# EAGLE board data_proV2 (EAGLE 7.6.0)
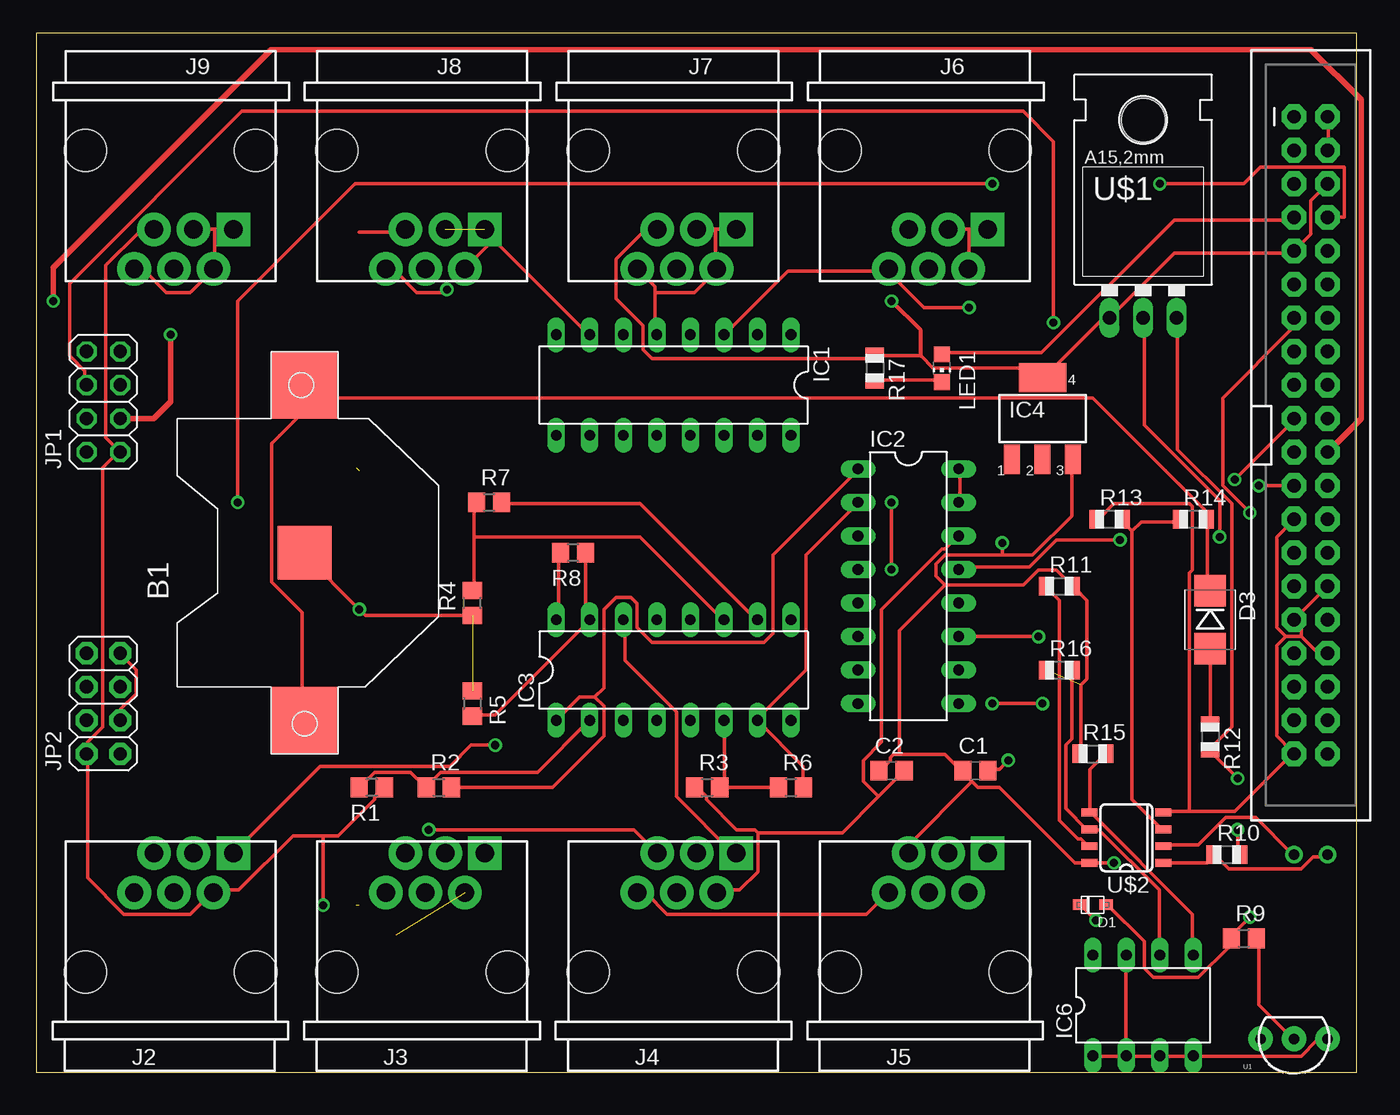
[diagram p0: board, top side]
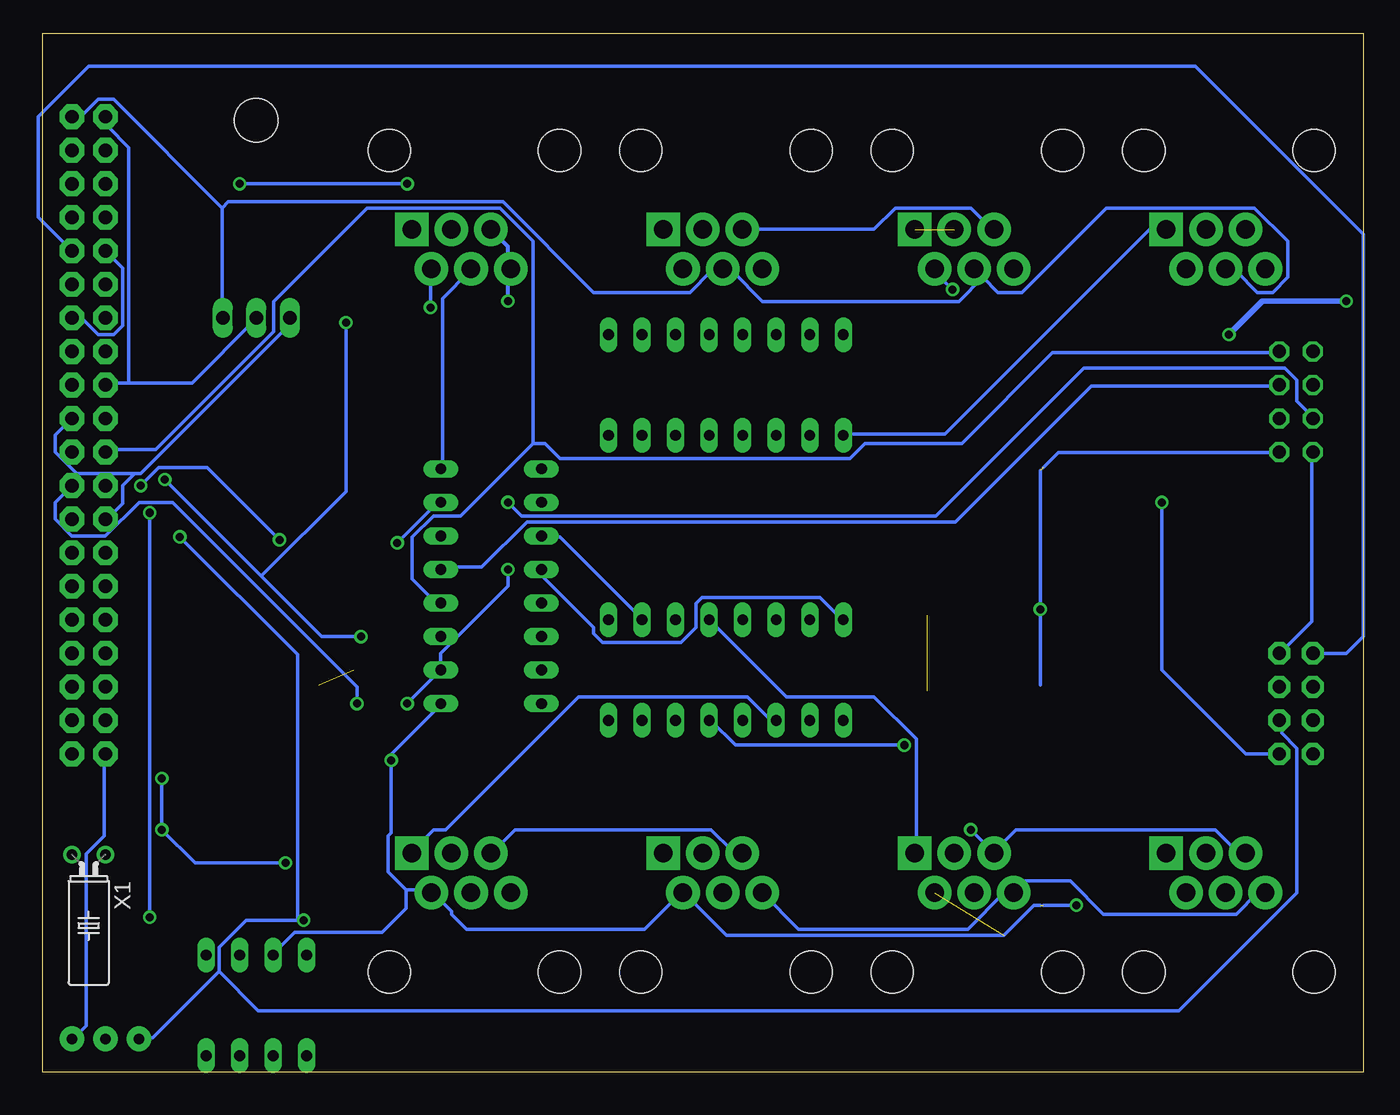
[diagram p1: board, bottom side, seen from below]

Size 100 x 78.73 mm. Coordinates in mm from the lower left corner, seen from the top.
Outline: 0,0 100,0 100,78.73 0,78.73 0,0
Copper layers (1*16): Top 0.035mm / dielectric 1.5mm / Bottom 0.035mm
Design rules "default": minimum track width 10mil, minimum drill 24mil, track to track 8mil, track to pad 8mil, pad to pad 8mil, via to via 8mil, smd to smd 8mil, copper to edge 40mil, drill to drill 8mil, minimum pad ring 10mil, minimum via ring 8mil, stop-mask expansion 4mil, vias tented up to drill 0mil, thermal gap 10mil

## Footprints (pad centres in the part's own frame; a part is rotated, then mirrored left to right if it is on the bottom)
CR2032-SMD = smd 5.08 x 5.08: +$1 -12.7,0; +$2 12.7,0 | smd 4.064 x 4.064: - 0,0
C0805 = smd 1.3 x 1.5: 1 -0.95,0; 2 0.95,0
SOD-323F = smd 1 x 0.8: A -1,0; C 1,0
SMB-DIODE = smd 2.4 x 2.4: A 2.2,0; C -2.2,0
DIL16 = drill 0.813 long: 1 -8.89,-3.81; 2 -6.35,-3.81; 3 -3.81,-3.81; 4 -1.27,-3.81; 5 1.27,-3.81; 6 3.81,-3.81; 7 6.35,-3.81; 8 8.89,-3.81; 9 8.89,3.81; 10 6.35,3.81; 11 3.81,3.81; 12 1.27,3.81; 13 -1.27,3.81; 14 -3.81,3.81; 15 -6.35,3.81; 16 -8.89,3.81
SOT223 = smd 1.219 x 2.235: 1 -2.311,-3.099; 2 0,-3.099; 3 2.311,-3.099 | smd 3.6 x 2.2: 4 0,3.099
DIL08 = drill 0.813 long: 1 -3.81,-3.81; 2 -1.27,-3.81; 3 1.27,-3.81; 4 3.81,-3.81; 5 3.81,3.81; 6 1.27,3.81; 7 -1.27,3.81; 8 -3.81,3.81
2X20-SHROUDED = drill 1.016 pad 1.88 octagon: 1 -1.27,24.13; 2 1.27,24.13; 3 -1.27,21.59; 4 1.27,21.59; 5 -1.27,19.05; 6 1.27,19.05; 7 -1.27,16.51; 8 1.27,16.51; 9 -1.27,13.97; 10 1.27,13.97; 11 -1.27,11.43; 12 1.27,11.43; 13 -1.27,8.89; 14 1.27,8.89; 15 -1.27,6.35; 16 1.27,6.35; 17 -1.27,3.81; 18 1.27,3.81; 19 -1.27,1.27; 20 1.27,1.27; 21 -1.27,-1.27; 22 1.27,-1.27; 23 -1.27,-3.81; 24 1.27,-3.81; 25 -1.27,-6.35; 26 1.27,-6.35; 27 -1.27,-8.89; 28 1.27,-8.89; 29 -1.27,-11.43; 30 1.27,-11.43; 31 -1.27,-13.97; 32 1.27,-13.97; 33 -1.27,-16.51; 34 1.27,-16.51; 35 -1.27,-19.05; 36 1.27,-19.05; 37 -1.27,-21.59; 38 1.27,-21.59; 39 -1.27,-24.13; 40 1.27,-24.13
BTA = drill 1.4 pad 2.54 square: 1 4.75,9 | drill 1.4 pad 2.54: 2 3.25,6; 3 1.75,9; 4 0.25,6; 5 -1.25,9; 6 -2.75,6 | hole 3.2: 6.45,0; -6.45,0
BTD = drill 1.4 pad 2.54 square: 1 -4.75,6 | drill 1.4 pad 2.54: 2 -3.25,9; 3 -1.75,6; 4 -0.25,9; 5 1.25,6; 6 2.75,9 | hole 3.2: 6.45,0; -6.45,0
2X04 = drill 1.016 octagon: 1 -3.81,-1.27; 2 -3.81,1.27; 3 -1.27,-1.27; 4 -1.27,1.27; 5 1.27,-1.27; 6 1.27,1.27; 7 3.81,-1.27; 8 3.81,1.27
2X04' = drill 1.016 pad 1.676 octagon: 1 -3.81,-1.27; 2 -3.81,1.27; 3 -1.27,-1.27; 4 -1.27,1.27; 5 1.27,-1.27; 6 1.27,1.27; 7 3.81,-1.27; 8 3.81,1.27
CHIP-LED0805 = smd 1.2 x 1.2: A 0,-1.05; C 0,1.05
R0805 = smd 1.3 x 1.5: 1 -0.95,0; 2 0.95,0
R0805' = smd 1.1 x 1.4: 1 -1,0; 2 1,0
TO-92-AMMO = drill 0.813 pad 1.88: 1 -2.54,0; 2 0,0; 3 2.54,0
78XXL = drill 1.016 long: GND 0,-3.81; IN -2.54,-3.81; OUT 2.54,-3.81 | hole 3.302: 0,11.176
SO08-TIGHT = smd 0.6 x 1.2: 1 -1.905,-2.8; 2 -0.635,-2.8; 3 0.635,-2.8; 4 1.905,-2.8; 5 1.905,2.8; 6 0.635,2.8; 7 -0.635,2.8; 8 -1.905,2.8
TC38H = drill 0.813: 1 -1.27,0; 2 1.27,0

## Placement (x,y rotation side)
B1  [CR2032-SMD]  20.32,39.37 90 top
C1  0.1uFd  [C0805]  71.12,22.86 0 top
C2  0.1uFd  [C0805]  64.77,22.86 0 top
D1  [SOD-323F]  80.01,12.7 180 top
D3  [SMB-DIODE]  88.9,34.29 270 top
IC1  4049N  [DIL16]  48.26,52.07 180 top
IC2  MCP3008  [DIL16]  66.04,36.83 270 top
IC3  OP11S  [DIL16]  48.26,30.48 0 top
IC4  LM340MP-05  [SOT223]  76.2,49.53 0 top
IC6  AT24CP  [DIL08]  83.82,5.08 0 top
J1  RASPBERRYPI-40-PIN-GPIO  [2X20-SHROUDED]  96.52,48.26 0 top
J2  [BTA]  10.16,7.62 0 top
J3  [BTA]  29.21,7.62 0 top
J4  [BTA]  48.26,7.62 0 top
J5  [BTA]  67.31,7.62 0 top
J6  [BTD]  67.31,69.85 180 top
J7  [BTD]  48.26,69.85 180 top
J8  [BTD]  29.21,69.85 180 top
J9  [BTD]  10.16,69.85 180 top
JP1  [2X04]  5.08,50.8 90 top
JP2  [2X04']  5.08,27.94 90 top
LED1  [CHIP-LED0805]  68.58,53.34 180 top
R1  [R0805]  25.4,21.59 180 top
R2  [R0805]  30.48,21.59 0 top
R3  [R0805]  50.8,21.59 0 top
R4  [R0805]  33.02,35.56 90 top
R5  [R0805]  33.02,27.94 270 top
R6  [R0805]  57.15,21.59 0 top
R7  [R0805]  34.29,43.18 0 top
R8  [R0805]  40.64,39.37 180 top
R9  4.7k  [R0805]  91.44,10.16 0 top
R10  N/A?  [R0805']  90.17,16.51 0 top
R11  3.3k  [R0805']  77.47,36.83 0 top
R12  200  [R0805']  88.9,25.4 270 top
R13  1.5M  [R0805']  81.28,41.91 0 top
R14  510K  [R0805']  87.63,41.91 0 top
R15  3.3k  [R0805']  80.01,24.13 0 top
R16  3.3k  [R0805']  77.47,30.48 0 top
R17  1k  [R0805']  63.5,53.34 270 top
U1  DS18B20  [TO-92-AMMO]  95.25,2.54 180 top
U$1  V_REG_LD1117VXX  [78XXL]  83.82,60.96 0 top
U$2  DS1307SO8-TIGHT  [SO08-TIGHT]  82.55,17.78 90 top
X1  32.768khz  [TC38H]  96.52,16.51 180 bottom

## Library data of the parts
B1 D1 IC2 JP2 R10-R17 = adafruit
C1 C2 R1-R9 = resistor
D3 = SparkFun-DiscreteSemi; PROD_ID: DIO-09646
IC1 = 40xx
IC3 IC4 = linear
IC6 = atmel; MPN: AT24C1024BW-SH-B; OC_FARNELL: 1362646; OC_NEWARK: 03P2044
J1 = SparkFun-Boards
J2-J9 = SparkFun-Connectors
JP1 = pinhead
LED1 = led
U1 = SparkFun-Sensors; STORE_ID: SEN-00245
U$1 = SparkFun-PowerIC
U$2 = SparkFun-FreqCtrl; PROD_ID: IC-08138
X1 = crystal; OC_FARNELL: unknown; OC_NEWARK: unknown

## Nets
3.3V: D1.C J1.1 J1.17 JP1.2 JP2.3 JP2.7 U1.3 U$1.GND
5V: C1.1 C2.1 IC2.15 IC2.16 IC4.3 J1.2 J1.4 J2.5 J3.5 J4.5 J5.5 J6.4 J7.4 J8.4 J9.4 R10.2 R11.2 R12.2 R15.1 R16.1 U$1.OUT U$2.8
A1: IC2.1 IC3.1 R2.2
A2: IC2.2 IC3.7 R6.2
A3: IC2.3 IC3.10 R7.2
A4: IC2.4 IC3.16 R8.2
BATT: R13.2 R14.1 U$2.3
CE: J1.22 JP1.3
CSN: IC2.10 J1.24 JP1.4
DQ: D1.A J1.13 R9.1
GND: B1.- C1.2 C2.2 IC2.9 IC2.14 IC4.4 IC6.1 IC6.2 IC6.3 IC6.4 IC6.7 J1.6 J1.9 J1.14 J1.20 J1.25 J1.30 J1.34 J1.39 J2.2 J3.2 J4.2 J5.2 J6.5 J7.5 J8.5 J9.5 JP1.1 JP2.2 R1.1 R3.1 R4.1 R5.1 R13.1 R17.1 U1.1 U$1.IN U$2.4
GPIO0: JP2.6
GPIO2: JP2.4
IRQ: JP1.8
MISO: IC2.12 J1.21 JP1.7
MOSI: IC2.11 J1.19 JP1.6
N$1: U$2.2 X1.1
N$2: R10.1 U$2.1 X1.2
N$3: B1.+$1 B1.+$2 D3.C R14.2
N$4: J1.7 LED1.A
N$5: IC3.2 R1.2 R2.1
N$6: R9.2 U1.2
N$7: IC3.15 R5.2 R8.1
N$8: IC3.6 R3.2 R6.1
N$10: D3.A R12.1
N$11: IC1.3 J6.1 J6.2 J6.3 J6.6
N$12: IC1.5 J7.1 J7.2 J7.3 J7.6
N$13: IC1.2
N$14: IC1.7 J8.1 J8.2 J8.3 J8.6
N$15: IC1.9 J9.1 J9.2 J9.3 J9.6
N$16: IC3.11 R4.2 R7.1
N$17: LED1.C R17.2
N$21: IC1.4
N$22: IC1.6
N$23: IC1.10
RST: JP2.5
RX: J1.10 JP2.8
S1-5V1: IC3.5 J2.1
S1-5V2: IC3.12 J3.1
S1-5V3: IC3.3 J5.1
S1-5V4: IC3.14 J4.1
S1-10V: J2.6 J3.6 J4.6 J5.6
SCK: IC2.13 J1.23 JP1.5
SCL: IC6.6 R16.2 U$2.6
SDA: IC6.5 R15.2 U$2.5
SQ: R11.1 U$2.7
TX: J1.8 JP2.1
V+: IC3.4
V-: IC3.13
VCC: IC6.8
VDD: IC1.1
VSS: IC1.8

## Tracks (layer width: path | path; a pad name or v marks a point on that pad's centre or on a via)
3.3V  (via drill 0.61)
  Top 0.254: JP2.3 6.4,26.85 6.4,27.53 7.54,28.68 7.54,30.5 6.4,31.65 JP2.7 | v80.24,11.53 79.1,12.68 D1.C | v89.61,40.56 89.61,43.31 83.9,49.02 83.9,57.02 U$1.GND
  Bottom 0.254: JP1.2 3.89,46.96 3.89,34.16 6.17,31.88 JP2.7 | 80.7,11.53 84.58,11.53 86.64,9.47 86.64,7.64 | 86.64,7.64 91.67,2.62 92.58,2.62 U1.3 | 93.5,52.22 95.1,52.22 J1.17 | 93.5,52.22 88.7,52.22 83.9,57.02 U$1.GND | 93.5,52.22 93.5,70.05 95.1,71.65 95.1,72.34 J1.1 | 80.7,11.53 80.7,31.65 v89.61,40.56 | 80.7,11.53 v80.24,11.53 | 86.64,7.64 83.67,4.67 13.95,4.67 5.03,13.59 5.03,24.56 6.17,25.71 6.17,26.62 JP2.3
5V  (via drill 0.61)  (1 unrouted)
  Top 0.254: IC2.15 69.95,43.31 69.95,45.59 IC2.16 | R15.1 79.1,24.33 79.1,29.36 79.55,29.82 79.55,35.76 78.64,36.68 R11.2 78.41,36.91 77.27,38.05 75.89,38.05 74.75,36.91 68.81,36.91 | 73.15,39.19 68.81,39.19 68.12,38.51 68.12,37.59 68.81,36.91 | 73.15,39.19 75.44,39.19 78.41,42.16 78.41,46.28 IC4.3 | 73.15,39.19 v73.15,40.11 | 70.87,22.05 70.18,22.73 C1.1 69.95,22.96 68.81,24.11 65.38,24.11 | 70.87,22.05 71.32,21.59 72.92,21.59 78.64,15.88 U$2.8 v81.61,15.88 | 65.38,24.11 64.92,24.11 64.69,23.88 64.69,23.65 64.01,22.96 C2.1 | 70.87,22.05 66.06,17.25 66.06,16.79 J5.5 | v29.72,18.39 45.26,18.39 46.86,16.79 J4.5 | 68.81,36.91 65.38,33.48 65.38,24.11 | J1.4 97.84,70.05 97.84,72.34 J1.2 | U$1.OUT 86.41,57.02 86.41,47.19 90.53,43.08 90.53,26.16 88.92,24.56 R12.2 88.92,24.33 v90.98,22.28 | v90.98,18.39 90.98,16.56 R10.2
  Bottom 0.254: IC2.16 69.72,45.82 69.72,58.62 67.67,60.68 J6.4 | IC2.15 70.41,42.62 70.64,42.62 v73.15,40.11 | J2.5 8.91,16.79 9.6,16.79 11.2,18.39 26.29,18.39 27.89,16.79 J3.5 28.12,16.79 v29.72,18.39 | J4.5 47.09,16.79 47.78,16.79 49.38,18.39 64.24,18.39 65.84,16.79 J5.5 | 28.8,60.22 29.26,60.68 J8.4 28.8,60.22 | 28.8,60.22 27.66,59.08 25.83,59.08 19.43,65.48 8.23,65.48 5.71,62.97 5.71,60.22 6.86,59.08 8,59.08 9.6,60.68 10.29,60.68 J9.4 | 28.8,60.22 30.63,58.39 45.49,58.39 47.78,60.68 48.46,60.68 J7.4 48.69,60.68 49.38,60.68 50.98,59.08 58.29,59.08 65.15,65.94 85.95,65.94 86.41,65.48 | v90.98,22.28 v90.98,18.39 88.47,15.88 v81.61,15.88 | 86.41,65.48 94.64,73.71 95.78,73.71 96.93,72.57 97.61,72.57 J1.2 | 86.41,65.48 86.41,57.25 U$1.OUT
A1
  Top 0.254: R2.2 39.09,21.59 42.98,25.48 42.98,27.76 42.29,28.45 | 42.29,28.45 41.15,28.45 IC3.1 | 42.29,28.45 42.98,29.13 42.98,35.08 43.89,35.99 45.03,35.99 45.49,35.53 45.49,33.71 46.63,32.56 55.09,32.56 55.78,33.25 55.78,39.19 62.18,45.59 IC2.1
A2
  Top 0.254: R6.2 58.06,21.59 58.06,23.19 54.63,26.62 IC3.7 54.63,26.85 58.29,30.5 58.29,39.19 62.18,43.08 IC2.2
A3
  Top 0.254: R7.2 35.43,43.08 45.72,43.08 54.41,34.39 IC3.10
  Bottom 0.254: IC2.3 62.18,40.56 60.81,40.56 54.63,34.39 IC3.10
A4
  Top 0.254: R8.2 39.55,39.19 39.55,34.39 IC3.16
  Bottom 0.254: IC2.4 62.18,38.05 62.18,37.59 58.29,33.71 58.29,33.25 57.61,32.56 51.66,32.56 50.52,33.71 50.52,35.53 50.06,35.99 41.15,35.99 39.55,34.39 IC3.16
BATT
  Top 0.254: 82.98,41.02 82.98,20.68 85.04,18.62 85.27,18.62 U$2.3 | 82.98,41.02 82.3,41.71 R13.2 | 82.98,41.02 83.67,41.71 86.41,41.71 R14.1
CE  (via drill 0.6)
  Top 0.406: J1.22 100.33,49.53 100.33,73.66 96.52,77.47 17.78,77.47 1.27,60.96 v1.27,58.42 | v10.16,55.88 10.16,50.8 8.89,49.53 JP1.3
  Bottom 0.406: v1.27,58.42 7.62,58.42 v10.16,55.88
CSN  (via drill 0.6)
  Top 0.254: v64.77,38.1 v64.77,43.18 | v72.39,27.94 v76.2,27.94
  Bottom 0.254: JP1.4 3.89,49.71 5.03,50.85 5.03,52.45 5.94,53.36 21.16,53.36 32.36,42.16 63.75,42.16 v64.77,43.18 | v64.77,38.1 64.77,36.83 69.85,31.75 IC2.10 v72.39,27.94 | v76.2,27.94 76.2,29.21 90.17,43.18 92.71,43.18 95.25,40.64 97.79,40.64 99.06,41.91 99.06,43.18 J1.24
DQ  (via drill 0.61)
  Top 0.254: 90.3,10.16 90.3,9.47 88.01,7.19 84.58,7.19 83.9,7.87 83.9,9.93 81.15,12.68 D1.A | v91.9,42.39 89.84,44.45 89.84,51.08 95.1,56.34 95.1,57.02 J1.13 | 90.3,10.16 v91.9,11.76 | 90.3,10.16 R9.1
  Bottom 0.254: v91.9,11.76 v91.9,42.39
GND  (via drill 0.6, 0.61)  (4 unrouted)
  Top 0.254: 24.46,63.65 27.89,63.65 J8.5 | J7.5 46.86,63.65 45.95,63.65 43.89,61.59 43.89,58.62 45.95,56.57 45.95,54.74 46.63,54.05 63.09,54.05 63.32,54.28 R17.1 63.55,54.28 66.98,54.28 67.89,53.36 75.44,53.36 76.12,52.68 IC4.4 76.35,52.68 80.7,57.02 81.15,57.02 U$1.IN 86.18,62.05 95.1,62.05 J1.9 96.52,63.5 96.52,66.04 J1.6 | 21.72,17.93 19.43,17.93 15.32,13.82 13.49,13.82 J2.2 13.26,13.59 11.66,11.99 6.63,11.99 3.89,14.73 3.89,24.11 JP2.2 3.89,24.33 3.89,25.02 5.03,26.16 5.03,45.82 6.17,46.96 JP1.1 6.17,47.19 5.26,48.11 5.26,61.14 7.77,63.65 8.69,63.65 J9.5 | 21.72,17.93 22.86,17.93 25.6,20.68 25.6,20.9 26.29,21.59 R1.1 | R4.1 32.92,34.62 24.92,34.62 v24.46,35.08 20.34,39.19 B1.- | 95.78,33.02 96.93,31.88 97.61,31.88 J1.34 | 94.64,33.02 95.78,33.02 | 94.64,33.02 93.95,33.71 93.95,40.56 95.1,41.71 J1.25 | 87.33,19.76 90.75,19.76 95.1,24.11 J1.39 95.1,24.33 93.95,25.48 93.95,32.33 94.64,33.02 | 87.33,19.76 85.5,19.76 U$2.4 | 87.33,19.76 87.33,37.82 87.55,38.05 87.55,42.85 87.33,43.08 81.61,43.08 80.47,41.93 R13.1 | v73.61,23.65 72.92,22.96 72.24,22.96 C1.2 | IC6.1 80.01,1.25 82.53,1.25 IC6.2 | IC6.7 82.53,8.79 82.53,1.47 IC6.2 | IC6.2 82.75,1.25 85.04,1.25 IC6.3 85.27,1.25 87.55,1.25 IC6.4 87.78,1.25 95.78,1.25 96.93,2.39 97.61,2.39 U1.1 | 54.63,18.16 54.41,18.39 53.03,18.39 50.75,20.68 50.75,20.9 50.06,21.59 R3.1 | 54.63,18.16 54.63,15.19 53.26,13.82 51.66,13.82 J4.2 | 63.78,20.9 61.04,18.16 54.63,18.16 | 63.78,20.9 65.61,22.73 C2.2 | 63.78,20.9 62.64,22.05 62.64,23.65 64.01,25.02 64.01,35.08 68.58,39.65 68.81,39.65 69.72,40.56 IC2.14 | v21.72,12.68 21.72,17.93
  Top 0.254: 95.78,33.02 95.78,34.82 J1.30
  Top 0.305: 66.98,54.28 66.98,56.21 v64.77,58.42
  Bottom 0.254: J7.5 46.86,63.88 37.03,63.88 35.43,65.48 29.72,65.48 28.12,63.88 J8.5 | J1.14 97.61,57.02 96.93,57.02 95.78,55.88 94.64,55.88 93.95,56.57 93.95,60.91 95.1,62.05 J1.9 | 24.23,45.82 23.09,46.96 6.4,46.96 JP1.1 | 24.46,45.59 v24.46,35.08 24.46,29.36 | IC2.9 69.95,27.76 73.61,24.11 v73.61,23.65 73.61,18.16 73.84,17.93 73.84,15.19 72.47,13.82 | 72.47,13.82 70.64,13.82 J5.2 70.41,13.59 69.04,12.22 69.04,11.99 67.89,10.85 54.41,10.85 51.66,13.59 J4.2 51.44,13.59 48.23,10.39 27.2,10.39 24.92,12.68 24.46,12.68 | 72.47,13.82 72.47,12.45 74.3,10.62 80.92,10.62 82.53,9.02 IC6.7 | J1.39 95.33,24.11 95.33,17.93 96.7,16.56 96.7,3.53 97.61,2.62 U1.1 | 24.23,12.68 v21.72,12.68 | 93.04,45.36 92.58,45.36 81.38,56.57 81.38,57.02 U$1.IN | 93.04,45.36 93.95,44.45 93.95,43.08 95.1,41.93 J1.25 | 93.04,45.36 97.43,45.36 99.06,46.99 99.06,48.26 J1.20
  Bottom 0.305: v64.77,58.42 64.77,62.56 J6.5
MISO
  Bottom 0.254: 62.87,47.65 68.35,42.16 70.41,42.16 72.01,40.56 72.01,37.36 70.41,35.76 69.95,35.76 IC2.12 | 62.87,47.65 62.87,62.97 65.38,65.48 75.44,65.48 82.53,58.39 82.53,56.11 91.44,47.19 95.1,47.19 J1.21 | 62.87,47.65 61.95,47.65 60.81,46.51 38.86,46.51 37.72,47.65 30.4,47.65 23.55,54.51 6.4,54.51 JP1.7
MOSI  (via drill 0.61)
  Top 0.254: v75.89,33.02 IC2.11 | v90.75,44.91 95.33,49.48 J1.19 | v77.04,56.79 77.04,70.51 74.75,72.8 15.54,72.8 2.52,59.77 2.52,54.28 3.66,53.14 3.66,52.22 JP1.6
  Bottom 0.254: v75.89,33.02 78.87,33.02 83.44,37.59 | v90.75,44.91 83.44,37.59 | v77.04,56.79 77.04,43.99 83.44,37.59
N$1
  Top 0.254: U$2.2 85.5,17.25 88.01,17.25 90.07,19.3 92.35,19.3 95.1,16.56 X1.1
N$2
  Top 0.254: U$2.1 88.7,15.88 89.15,16.33 R10.1 89.38,16.33 90.3,15.42 95.78,15.42 96.7,16.33 97.61,16.33 X1.2
N$3
  Top 0.254: D3.C 88.7,36.68 88.7,41.71 R14.2 88.47,41.93 88.47,42.62 80.01,51.08 21.26,51.08 | 21.26,51.08 20.34,51.99 B1.+$2 21.26,51.08 | 21.26,51.08 17.83,47.65 17.83,37.13 20.12,34.85 20.12,26.85 B1.+$1
N$4
  Top 0.254: LED1.A 68.58,54.51 76.12,54.51 86.18,64.57 95.1,64.57 J1.7
N$5
  Top 0.254: 29.49,21.59 28.35,22.73 25.6,22.73 R1.2 | 29.49,21.59 30.63,22.73 37.95,22.73 41.83,26.62 IC3.2 | 29.49,21.59 R2.1
N$6
  Top 0.254: R9.2 92.58,10.16 92.58,5.13 95.1,2.62 U1.2
N$7
  Top 0.254: R5.2 33.15,27.08 34.75,27.08 41.83,34.16 IC3.15 41.83,34.39 41.6,34.62 41.6,39.19 R8.1
N$8
  Top 0.254: R6.1 52.12,21.59 | 52.12,21.59 R3.2 51.89,21.59 | 52.12,21.59 52.12,26.62 IC3.6
N$10
  Top 0.254: R12.1 88.92,26.62 88.92,31.88 D3.A
N$11  (via drill 0.61)
  Top 0.254: 70.64,63.88 72.01,63.88 J6.1 | 70.64,63.88 69.27,63.88 J6.3 | 70.64,63.88 70.64,60.91 J6.2 | 64.47,60.68 56.92,60.68 52.12,55.88 IC1.3 | v70.64,57.94 67.21,57.94 64.47,60.68 | 64.47,60.68 J6.6
  Bottom 0.254: v70.64,57.94 70.64,60.68 J6.2
N$12
  Top 0.254: 46.86,59.08 46.86,59.54 45.72,60.68 J7.6 | 46.86,59.08 46.86,55.88 IC1.5 | 51.44,63.88 52.81,63.88 J7.1 | 51.44,63.88 50.06,63.88 J7.3 | 51.44,63.88 51.44,60.91 J7.2 51.44,60.68 49.84,59.08 46.86,59.08
N$14  (via drill 0.61)  (1 unrouted)
  Top 0.254: v31.09,59.31 30.86,59.08 28.8,59.08 27.2,60.68 26.52,60.68 J8.6 | 34.52,63.2 34.06,63.65 J8.1 34.52,63.2 | 34.52,63.2 41.83,55.88 IC1.7 | 34.52,63.2 34.52,62.97 32.46,60.91 J8.2
  Bottom 0.254: v31.09,59.31 32.46,60.68 J8.2
N$15
  Top 0.254: J9.6 7.54,60.68 8.23,60.68 9.83,59.08 11.66,59.08 13.26,60.68 J9.2 13.49,60.91 13.49,63.88 | 13.49,63.88 14.86,63.88 J9.1 | 13.49,63.88 12.12,63.88 J9.3
  Bottom 0.254: IC1.9 39.32,48.34 31.67,48.34 15.09,64.92 J9.1
N$16
  Top 0.254: 33.15,40.56 33.15,43.08 R7.1 | 33.15,40.56 33.15,36.68 R4.2 | 33.15,40.56 45.72,40.56 51.89,34.39 IC3.11
N$17
  Top 0.254: LED1.C 68.58,52.45 63.55,52.45 R17.2
RX
  Bottom 0.254: JP2.8 1.27,31.75 0,33.02 0,63.5 12.7,76.2 96.52,76.2 100.33,72.39 100.33,64.77 J1.10
S1-5V1  (via drill 0.61)
  Top 0.254: v34.75,24.79 32.92,24.79 31.32,23.19 21.49,23.19 15.09,16.79 J2.1
  Bottom 0.254: v34.75,24.79 47.55,24.79 49.38,26.62 IC3.5
S1-5V2
  Bottom 0.254: IC3.12 49.38,34.16 43.66,28.45 37.03,28.45 33.83,25.25 33.83,16.79 J3.1
S1-5V3
  Bottom 0.254: IC3.3 44.58,26.85 45.03,26.85 46.63,28.45 59.44,28.45 69.49,18.39 70.41,18.39 72.01,16.79 J5.1
S1-5V4
  Top 0.254: IC3.14 44.58,34.16 44.58,31.19 48.46,27.3 48.46,20.9 52.81,16.56 J4.1
S1-10V
  Top 0.254: J4.6 45.72,13.59 46.18,13.59 47.78,11.99 62.87,11.99 64.47,13.59 J5.6
  Bottom 0.254: J2.6 7.54,13.59 8,13.59 9.6,11.99 19.66,11.99 22.17,14.5 25.6,14.5 26.29,13.82 J3.6 26.52,13.59 27.2,13.59 29.95,10.85 42.75,10.85 45.49,13.59 J4.6
SCK  (via drill 0.61)
  Top 0.254: v92.58,44.45 J1.23 | v82.07,40.33 77.27,40.33 75.21,38.28 69.95,38.28 IC2.13
  Bottom 0.254: IC2.13 69.72,38.28 66.75,38.28 63.32,41.71 30.86,41.71 20.57,51.99 6.4,51.99 JP1.5 | v92.58,44.45 91.21,45.82 87.55,45.82 v82.07,40.33
SCL
  Top 0.254: IC6.6 85.04,9.02 85.04,13.82 80.47,18.39 79.78,18.39 U$2.6 79.55,18.39 77.95,19.99 77.95,24.79 78.41,25.25 78.41,30.28 R16.2
SDA
  Top 0.254: 79.78,19.76 79.78,22.96 80.92,24.11 R15.2 | 79.78,19.76 87.55,11.99 87.55,9.02 IC6.5 | 79.78,19.76 U$2.5
SQ
  Top 0.254: U$2.7 79.55,17.25 79.1,17.7 78.87,17.7 77.5,19.07 77.5,35.76 76.58,36.68 R11.1
TX  (via drill 0.6)
  Top 0.254: v15.24,43.18 15.24,58.42 24.13,67.31 v72.39,67.31 | v85.09,67.31 91.44,67.31 92.71,68.58 99.06,68.58 99.06,64.77 J1.8
  Bottom 0.254: JP2.1 8.89,24.13 15.24,30.48 v15.24,43.18 | v72.39,67.31 v85.09,67.31